# Altium PCB interface.PcbDoc (part 2 of 2)
Units mm, origin at the board's own origin, x right, y up, seen from the top; angles counter-clockwise.
Board outline 52.5 x 75 mm, 4 copper layers (Top Layer 1, Top Layer, Bottom Layer, Bottom Layer 1), stack 1.483 mm thick; 90 components, 72 nets, 327 pads, 41 vias.
Unrouted connection lines stored in the file: 2.
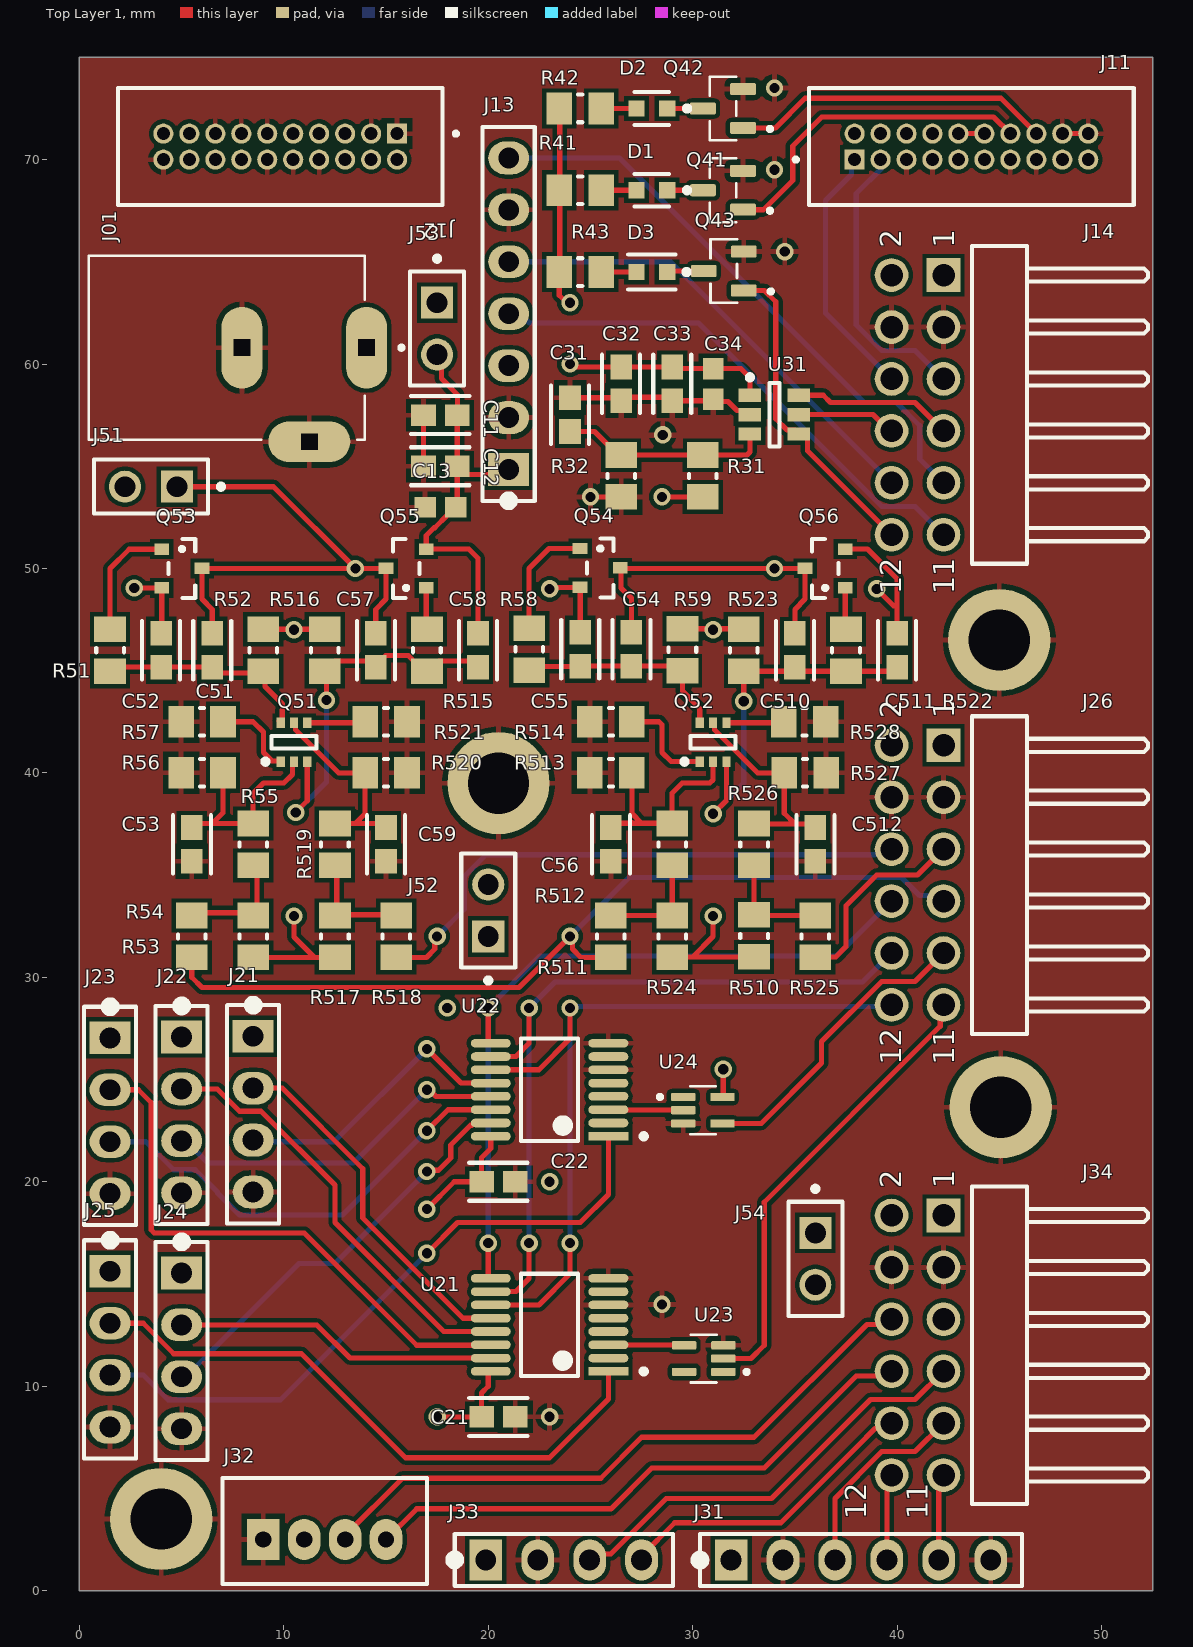
[diagram p0: Top Layer 1 view]

## Via types
v1: diameter 0.85, hole 0.5, Top Layer 1 to Bottom Layer 1, 39 vias
v2: diameter 0.85/0.85/0.85/0.85 (per signal layer), hole 0.5, Top Layer 1 to Bottom Layer 1, 2 vias

## Nets (pads, with @x,y where several pads share a name; then routed paths per layer and width w, separated by ;. In a path a pad name is that pad's centre, name@x,y a point inside that pad or via, vN(x,y) a via of type N, cw(c..) or ccw(c..) an arc to the next point about the centre after c; other vN are vias at no path point) (continued)
NetD1_2: D1.2 R41.1 | length 1.7
  Top Layer 1 w0.254: R41.1 D1.2
NetD2_1: D2.1 Q42.3 | length 1.7
  Top Layer 1 w0.254: D2.1 Q42.3
NetD2_2: D2.2 R42.1 | length 1.7
  Top Layer 1 w0.254: R42.1 D2.2
NetD3_1: D3.1 Q43.3 | length 1.8
  Top Layer 1 w0.254: D3.1 28.8,64.55 Q43.3
NetD3_2: D3.2 R43.1 | length 1.7
  Top Layer 1 w0.254: R43.1 D3.2
NetQ51_1: Q51.1 R57.2 | length 4.2
  Top Layer 1 w0.254: R57.2 8.5,42.5 9,42 9,41 9.418,40.582 9.818,40.582 Q51.1
NetQ51_4: Q51.4 R521.2 | length 2.8
  Top Layer 1 w0.254: Q51.4 13.925,42.45 R521.2
NetQ52_1: Q52.1 R514.2 | length 5
  Top Layer 1 w0.254: R514.2 R514.2@27.379,42.5 ; R514.2@27.379,42.627 27.506,42.5 27.525,42.5 28.351,42.5 28.5,42.351 28.5,41 28.95,40.55 Q52.1
NetQ52_4: Q52.4 R528.2 | length 2.8
  Top Layer 1 w0.254: Q52.4 34.4,42.45 R528.2
NetQ53_1: Q53.1 R51.2 | length 5.9
  Top Layer 1 w0.254: R51.2 1.5,50 2.438,50.938 4.02,50.938 Q53.1
NetQ54_1: Q54.1 R58.2 | length 5.8
  Top Layer 1 w0.254: R58.2 22,50 22.975,50.975 Q54.1
NetQ55_1: Q55.1 R515.2 | length 2
  Top Layer 1 w0.254: Q55.1 16.968,47.057 R515.2
NetQ56_1: Q56.1 R522.2 | length 2
  Top Layer 1 w0.254: Q56.1 37.468,47.057 R522.2
NetR53_1: R53.1 R54.2 R55.1 | length 5.6
  Top Layer 1 w0.254: R54.2 5.637,33.162 8.363,33.162 R53.1 ; R55.1 8.687,35.288 8.687,33.212 R53.1@8.575,33.1
NetR510_1: R510.1 R511.2 R512.1 | length 5.4
  Top Layer 1 w0.254: R511.2 26.002,33.027 28.998,33.027 R510.1 ; R510.1@29,33.027 R512.1
NetR517_1: R517.1 R518.2 R519.1 | length 5.5
  Top Layer 1 w0.254: R517.1 12.587,33.112 12.587,35.388 R519.1 ; R517.1@12.537,33.062 15.463,33.062 R518.2
NetR524_1: R524.1 R525.2 R526.1 | length 5.5
  Top Layer 1 w0.254: R524.1 R524.1@33,33.025 ; R526.1 R524.1@33,33.025 ; R525.2 R524.1@33,33.025
NFC_FD: J31.3 J34.9 | length 9.8
  Top Layer 1 w0.254: J31.3 36.96,4.509 39.253,6.802 40.882,6.802 J34.9
NFC_I2C_SCL: J31.5 J34.11 | length 4.2
  Top Layer 1 w0.254: J31.5 42.04,5.42 J34.11
NFC_I2C_SDA: J31.4 J34.12 | length 4.2
  Top Layer 1 w0.254: J31.4 39.5,5.42 J34.12
PWR_MGT_GSM: J26.6 R518.1 | length 27.7
  Top Layer 1 w0.254: R518.1 16.975,30.975 17.386,31.386 17.386,31.886 v1(17.5,32)
  Bottom Layer 1 w0.254: v1(17.5,32) 18.827,33.327 18.827,34.939 19.887,36 38.883,36 38.886,36.003 39.463,36.003 J26.6
PWR_MGT_NFC: J26.5 R525.1 | length 9.6
  Top Layer 1 w0.254: R525.1 36.025,31 37,31 37.5,31.5 37.5,33.5 39,35 41,35 J26.5
PWR_MGT_US: J26.7 R54.1 R511.1 | length 43.4
  Top Layer 1 w0.254: R54.1 5.5,30 6,29.5 21.5,29.5 v1(24,32) 24.114,31.886 24.114,31.386 24.525,30.975 R511.1
  Bottom Layer 1 w0.254: v1(24,32) 26.882,34.882 40.207,34.882 41.092,33.997 42.003,33.997 J26.7
US_1_ECHO_5V: J21.3 U22.12 | length 14.2
  Top Layer 1 w0.254: v1(17,26.5) 18.675,24.825 U22.12
  Bottom Layer 1 w0.254: J21.3 8.58,21.96 12.46,21.96 v1(17,26.5)
US_1_TRIG_5V: J21.2 U21.12 | length 17.7
  Top Layer 1 w0.254: J21.2 9.92,24.58 13.862,20.638 13.862,18.229 18.766,13.325 U21.12
US_2_ECHO_5V: J22.3 U22.13 | length 17.2
  Top Layer 1 w0.254: v1(17,24.5) 17.122,24.5 17.447,24.175 U22.13
  Bottom Layer 1 w0.254: J22.3 5.2,22 6.287,20.913 13.413,20.913 v1(17,24.5)
US_2_TRIG_5V: J22.2 U21.13 | length 21.1
  Top Layer 1 w0.254: J22.2 6.746,24.54 7.833,23.453 8.881,23.453 12.5,19.834 12.5,18 17.825,12.675 U21.13
US_3_ECHO_5V: J23.3 U22.14 | length 22.3
  Top Layer 1 w0.254: v1(17,22.5) 18.025,23.525 U22.14
  Bottom Layer 1 w0.254: J23.3 3.246,21.96 4.619,20.587 5.667,20.587 6.75,19.504 6.75,19.456 7.833,18.373 12.873,18.373 v1(17,22.5)
US_3_TRIG_5V: J23.2 U21.14 | length 27.5
  Top Layer 1 w0.254: J23.2 2.881,24.5 3.516,23.865 3.516,17.649 3.665,17.5 11,17.5 16.5,12 20.1,12 U21.14
US_4_ECHO_5V: J24.3 U22.15 | length 20.6
  Top Layer 1 w0.254: v1(17,20.5) 17.066,20.566 17.566,20.566 18.165,21.165 18.165,21.792 19.135,22.762 19.2,22.762 19.312,22.875 U22.15
  Bottom Layer 1 w0.254: J24.3 5.2,10.46 7,12.26 10.74,16 12.5,16 15.943,19.443 v1(17,20.5)
US_4_TRIG_5V: J24.2 U21.15 | length 15.8
  Top Layer 1 w0.254: J24.2 11.61,13 13.235,11.375 U21.15
US_5_ECHO_5V: J25.3 U22.1 | length 31.9
  Top Layer 1 w0.254: v1(17,16.5) 18.5,18 24.5,18 25.875,19.375 U22.1
  Bottom Layer 1 w0.254: J25.3 3.126,10.54 4.333,9.333 9.833,9.333 v1(17,16.5)
US_5_TRIG_5V: J25.2 U21.1 | length 29.6
  Top Layer 1 w0.254: J25.2 3.126,13.08 4.619,11.587 10.864,11.587 15.951,6.5 23,6.5 25.875,9.375 U21.1
US_ECHO_3V3: J26.9 U24.4 | length 14.9
  Top Layer 1 w0.254: U24.4 33.35,22.85 36.304,25.804 36.304,26.853 39.253,29.802 40.882,29.802 J26.9
US_ECHO_5V: U22.3 U24.2 | length 3.7
  Top Layer 1 w0.254: U22.3 25.888,23.513 29.527,23.513 U24.2
US_SEL_0: J26.12 U21.11 U22.11 | length 39.3
  Top Layer 1 w0.254: U21.11 22.475,13.975 24,15.5 v1(24,17) ; U22.11 22.475,25.475 24,27 v1(24,28.5)
  Bottom Layer 1 w0.254: v1(24,17) v1(24,28.5) 24.075,28.575 39.655,28.575 J26.12
US_SEL_1: J26.10 U21.10 U22.10 | length 38.1
  Top Layer 1 w0.254: U21.10 21.351,14.625 22,15.274 v1(22,17) ; U22.10 21.351,26.125 22,26.774 v1(22,28.5)
  Bottom Layer 1 w0.254: v1(22,17) v1(22,28.5) 23.268,29.768 38.308,29.768 J26.10
US_SEL_2: J26.8 U21.9 U22.9 | length 37
  Top Layer 1 w0.254: v1(20,17) 20,15.352 20.077,15.275 U21.9 ; v1(20,28.5) 20,26.852 20.077,26.775 U22.9
  Bottom Layer 1 w0.254: v1(20,17) v1(20,28.5) 22.538,31.038 37.038,31.038 J26.8
US_TRIG_3V3: J26.11 U23.2 | length 22.6
  Top Layer 1 w0.254: U23.2 32.85,11.35 33.5,12 33.5,19 42.111,27.611 42.111,28.491 J26.11
US_TRIG_5V: U21.3 U23.4 | length 3.7
  Top Layer 1 w0.254: U21.3 25.888,12.013 29.568,12.013 U23.4
pads on no net: J11.2 J11.4 J11.6 J11.8 J11.9 J11.11 J11.17 J11.19 J14.1 J14.2 J26.1 J26.2 J34.1 J34.2 J34.5 U21.2 U21.4 U21.5 U21.7 U22.2 U22.4 U22.5 U22.7 U23.1 U24.1
copper on no net:
  other v1: 23,20

## Polygon pours and split planes (outlines as drawn)
+12V on Top Layer "+12V_L02_P009" (solid, pour order 9): 8.5,70.5 0,70.5 0,56.5 6,50.5 6,41 12.5,41 12.5,42.5 15.5,45.5 17.5,45.5 22.5,50.5 26,50.5 26,47 29.5,43.5 31.5,43.5 33,45 33,50.5 28.5,55 20.91,55 15.5,49.59 15.5,49.5 13,49.5 11.5,51 11.5,52 11.5,63.5 8.5,63.5
+5V on Top Layer "+5V_L02_P008" (solid, pour order 8): 23,60.5 25,62.5 25,64 23,66 23,70.5 13.5,70.5 11,70.5 8.5,70.5 8.5,63.5 11.5,63.5 11.5,52 11.5,51 13,49.5 15.5,49.5 20.5,54.5 20.5,54.59 20.91,55 23,55
+3V3 on Top Layer "+3V3_L02_P007" (solid, pour order 7): 23,70.5 23,66 25,64 25,62.212 23,60.212 23,55.204 23.204,55 28.5,55 33,50.5 33,45 31.5,43.5 29.296,43.5 29.296,31.5 33.401,27.395 33.419,27.395 33.419,23.204 30.563,23.204 12.578,41.188 12.39,41 6,41 6,34 19,21 21,21 21,8.5 19,6.5 0,6.5 0,0 28,0 36.5,8.5 36.5,11.5 34.5,13.5 34.5,16.5 37.5,16.5 37.5,52 40.5,55 52.5,55 52.5,75 0,75 0,70.5 13.5,70.5
+3V3_NFC on Top Layer "+3V3_NFC_L02_P002" (solid, pour order 2): 36.5,8.5 36.5,11.5 34.5,13.5 34.5,16.5 37.5,16.5 37.5,52 40.5,55 52.5,55 52.5,0 28,0
no net on Top Layer "NONET_L02_P014" (solid, pour order 14): 36.5,11.5 34.5,11.5 32.5,13.5 32.5,16.5 36.5,16.5
+3V3_US on Top Layer "+3V3_US_L02_P003" (solid, pour order 3): 29.5,43.5 29.5,31.5 33.5,27.5 33.5,23.081 33.419,23 30.5,23 12.5,41 12.5,42.5 15.5,45.5 17.5,45.5 19.5,47.5 22.5,50.5 26,50.5 26,47
+5V_US on Top Layer "+5V_US_L02_P000" (solid, pour order 0): 0,6.5 19,6.5 21,8.5 21,21 19,21 6,34 6,50.5 0,56.5
GND on Bottom Layer "GND_L03_P011" (solid, pour order 11): 0,75 52.5,75 52.5,0 0,0
GND on Bottom Layer 1 "GND_L04_P015" (solid, pour order 15): 0,75 52.5,75 52.5,0 0,0
GND on Top Layer 1 "GND_L01_P017" (solid, pour order 17): 0,75 52.5,75 52.5,0 0,0

## Text inside footprints (layer, text, board x,y; h text height)
J14: Top Overlay "11" at 42.8,48.73 h1.02 r90; Top Overlay "12" at 40.2,48.73 h1.02 r90; Top Overlay "2" at 40.2,65.68 h1.02 r90; Top Overlay "1" at 42.8,65.68 h1.02 r90
J26: Top Overlay "11" at 42.8,25.73 h1.02 r90; Top Overlay "12" at 40.2,25.73 h1.02 r90; Top Overlay "2" at 40.2,42.68 h1.02 r90; Top Overlay "1" at 42.8,42.68 h1.02 r90
J34: Top Overlay "11" at 41.5,3.5 h1.02 r90; Top Overlay "12" at 38.5,3.5 h1.02 r90; Top Overlay "2" at 40.2,19.68 h1.02 r90; Top Overlay "1" at 42.8,19.68 h1.02 r90